# Altium PCB Optical Compresor_V1.PcbDoc (part 2 of 2)
Units mm, origin at the board's own origin, x right, y up, seen from the top; angles counter-clockwise.
Board outline 100 x 95 mm, 2 copper layers (Top Layer, Bottom Layer); 118 components, 73 nets, 334 pads, 87 vias.
Unrouted connection lines stored in the file: 63.
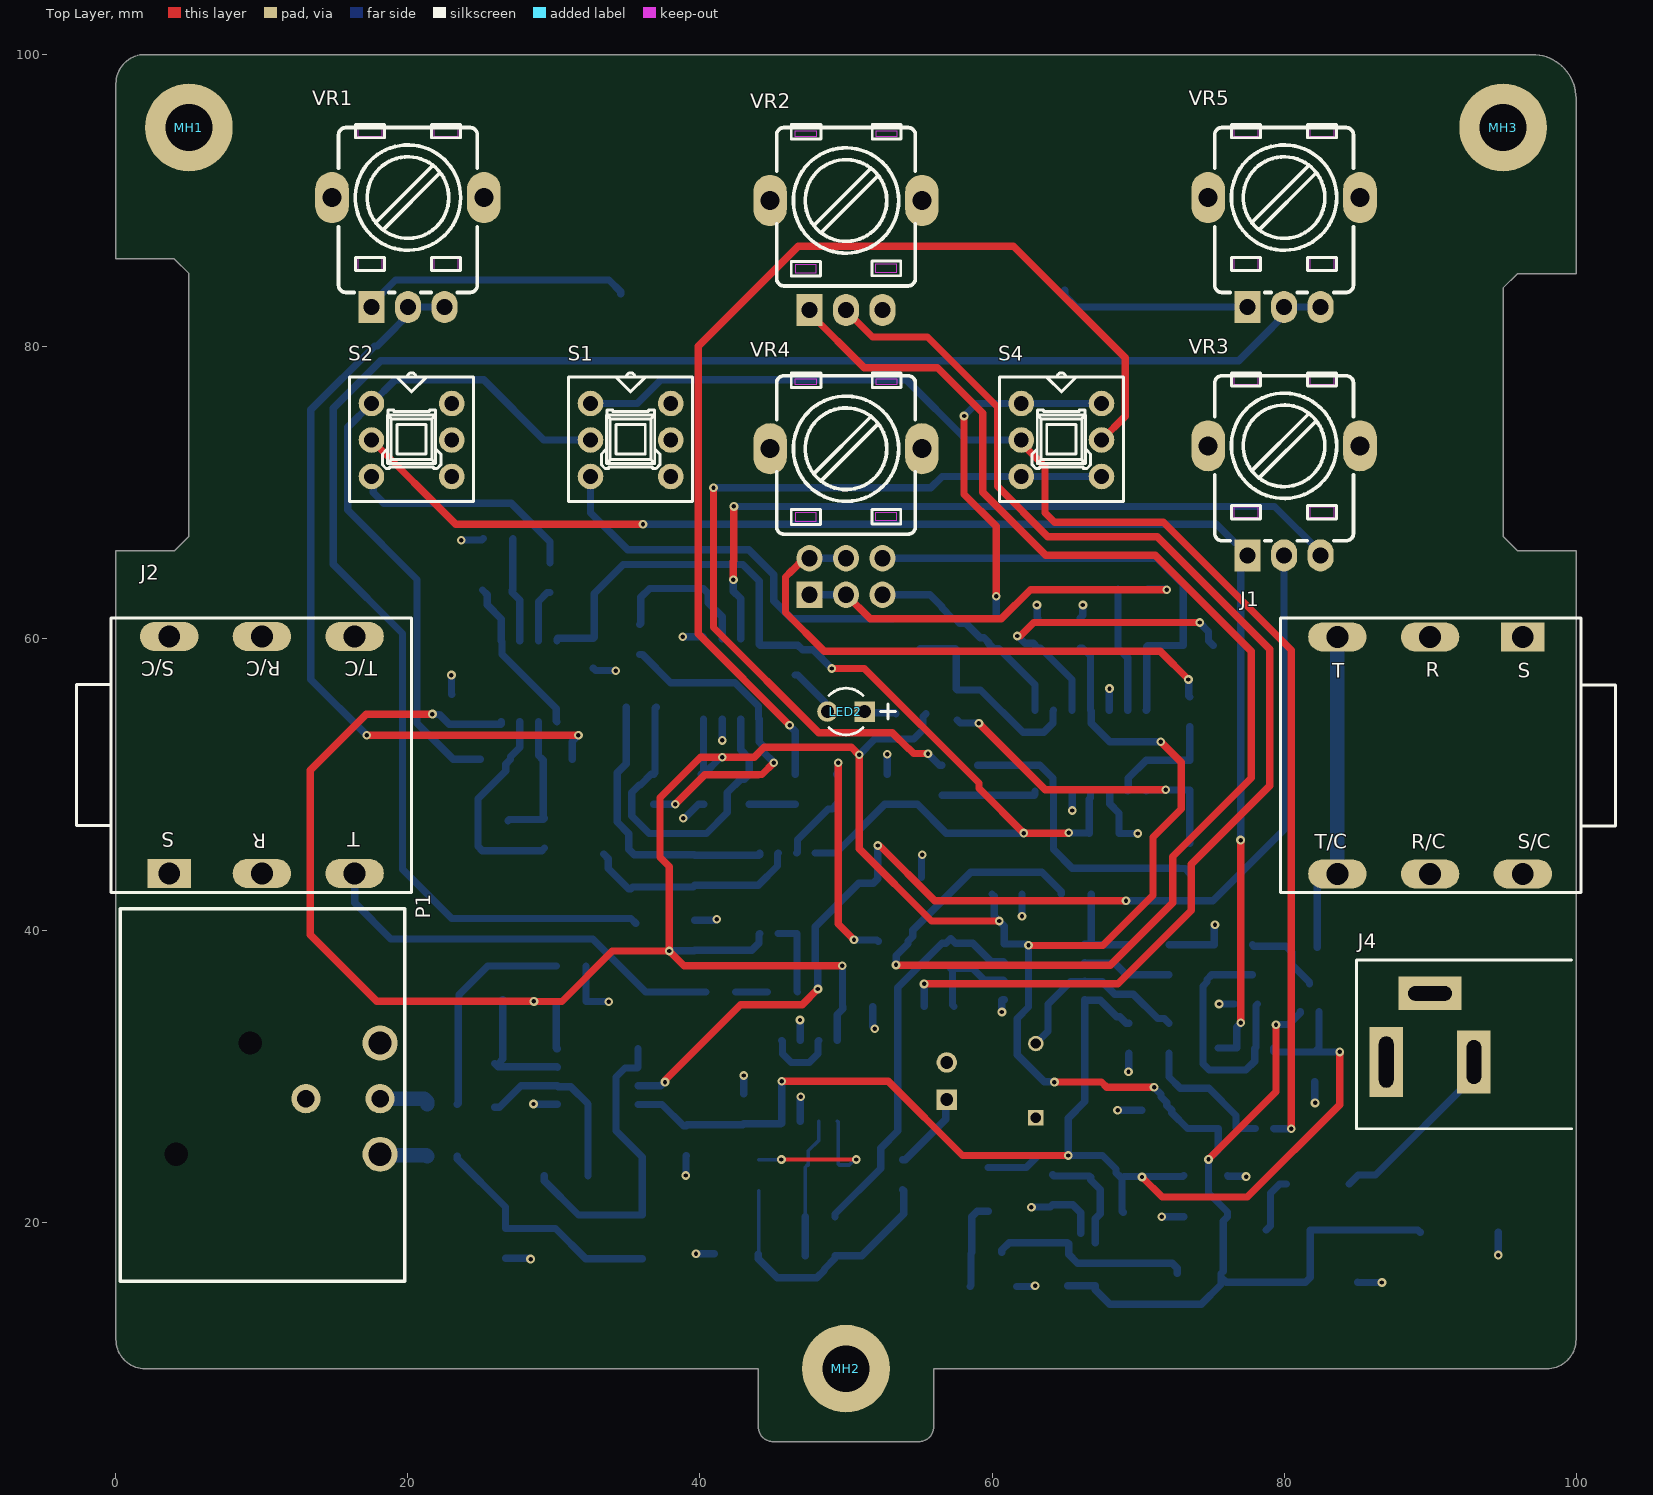
[diagram p0: Top Layer view]

## Part data (continued)
U2 U5: library part CMP-032-0003-7, "IC OPAMP GP 5MHZ 8SOIC", Case/Package=SOIC, Input Bias Current=500nA, Input Offset Voltage (Vos)=3mV, Manufacturer="ON Semiconductor", Manufacturer Part Number=MC33178DR2G, Max Dual Supply Voltage=18V, Max Frequency=100kHz, Max Operating Temperature=85°C, Min Dual Supply Voltage=2V, Min Operating Temperature=-40°C, Nominal Supply Current=900uA, Operating Supply Current=1.7mA, Output Current=80mA, Output Current per Channel=100mA, Package Quantity=1, Power Supply Rejection Ratio (PSRR)=80dB, Voltage Gain=106.02dB, Bandwidth=5MHz, Common Mode Rejection Ratio=80dB, ComponentLink1Description=https://datasheet.ciiva.com/30481/0900766b811a6563-30481352.pdf?src-supplier=RSComponents, ComponentLink1URL=https://datasheet.ciiva.com/30481/0900766b811a6563-30481352.pdf?src-supplier=RSComponents, ComponentLink2Description=https://datasheet.ciiva.com/1796/mc33178-d-1796435.pdf?src-supplier=Digi-Key, ComponentLink2URL=https://datasheet.ciiva.com/1796/mc33178-d-1796435.pdf?src-supplier=Digi-Key, ComponentLink3Description=https://datasheet.ciiva.com/1796/mc33178-d-1796436.pdf?src-supplier=Digi-Key, ComponentLink3URL=https://datasheet.ciiva.com/1796/mc33178-d-1796436.pdf?src-supplier=Digi-Key, ComponentLink4Description=https://datasheet.ciiva.com/8078/89824-8078566.pdf?src-supplier=Element14, ComponentLink4URL=https://datasheet.ciiva.com/8078/89824-8078566.pdf?src-supplier=Element14, ComponentLink5Description=https://datasheet.ciiva.com/48491/mc33178-d-48491755.pdf?src-supplier=Avnet, ComponentLink5URL=https://datasheet.ciiva.com/48491/mc33178-d-48491755.pdf?src-supplier=Avnet, ComponentLink6Description=https://datasheet.ciiva.com/2973/mc33178-d-2973665.pdf?src-supplier=Avnet, ComponentLink6URL=https://datasheet.ciiva.com/2973/mc33178-d-2973665.pdf?src-supplier=Avnet, ComponentLink7Description=https://datasheet.ciiva.com/1796/mc33178-d-1796437.pdf?src-supplier=Digi-Key, ComponentLink7URL=https://datasheet.ciiva.com/1796/mc33178-d-1796437.pdf?src-supplier=Digi-Key, ComponentLink8Description=https://datasheet.ciiva.com/17068/70275428-17068423.pdf?src-supplier=Allied+Electronics, ComponentLink8URL=https://datasheet.ciiva.com/17068/70275428-17068423.pdf?src-supplier=Allied+Electronics, ComponentLink9Description=https://datasheet.ciiva.com/26056/mc33178-d-26056808.pdf?src-supplier=Avnet+Europe, ComponentLink9URL=https://datasheet.ciiva.com/26056/mc33178-d-26056808.pdf?src-supplier=Avnet+Europe, Contact Plating=Tin, Design Item ID=MC33178D, Gain Bandwidth Product=5MHz, Halogen Free="Halogen Free", Height=0.059inch, Lead Free="Lead Free", Length=0.196inch, Max Supply Voltage=18V, Mouser part=863-MC33178DG, Nominal Gain Bandwidth Product=5MHz, Number of Amplifiers=2, Number of Channels=2, Number of Circuits=2, Number of Elements=2, Number of Pins=8, Packaging="Tape and Reel", PartId=1, Pricing 1="1 = 0.86000, 10 = 0.75300, 100 = 0.57700, 500 = 0.45614, 1000 = 0.36492 (USD)", Radiation Hardening=No, REACH SVHC="No SVHC", RoHS=Yes, Slew Rate=2V/µs, Source=main.SchLib, Stock 1=25846, Unity Gain Bandwidth Product=5MHz, Width=0.157inch
U7: library part CMP-0069-01166-3, "1.4MHz Cuk Converter, 5-pin SOT-23, Pb-Free", Manufacturer="Texas Instruments", PackageTopMarking=S40B*XTT, PowerWise=N, ComponentLink1Description="Datasheet URL", ComponentLink1URL=http://www.ti.com/general/docs/lit/getliterature.tsp?genericPartNumber=LM2611&fileType=pdf, CompType=Switcher, PackageDescription="Molded SOT-23, .115 x .063 x .040 in Body, 5 Lead, .0375 in Pitch", PackageReference=DBV0005A, PinCount=5, RoHS=Y
U8: library part CMP-028-0019-6, "Operational Amplifiers - Op Amps 2-18V Quad Low Power Industrial Temp SOIC14", Case/Package=SOIC, Input Bias Current=500nA, Input Offset Voltage (Vos)=3mV, Manufacturer="ON Semiconductor", Manufacturer Part Number=MC33179DR2G, Max Dual Supply Voltage=18V, Max Operating Temperature=85°C, Min Dual Supply Voltage=2V, Min Operating Temperature=-40°C, Nominal Supply Current=1.7mA, Output Current=80mA, Output Current per Channel=100mA, Package Quantity=2500, Power Supply Rejection Ratio (PSRR)=80dB, Voltage Gain=106.02dB, Bandwidth=5MHz, Common Mode Rejection Ratio=80dB, ComponentLink1Description=https://datasheet.ciiva.com/30481/0900766b81276f1b-30481445.pdf?src-supplier=RSComponents, ComponentLink1URL=https://datasheet.ciiva.com/30481/0900766b81276f1b-30481445.pdf?src-supplier=RSComponents, ComponentLink2Description=https://datasheet.ciiva.com/5787/89824-5787686.pdf?src-supplier=Farnell, ComponentLink2URL=https://datasheet.ciiva.com/5787/89824-5787686.pdf?src-supplier=Farnell, ComponentLink3Description=https://datasheet.ciiva.com/26056/mc33178-d-26056822.pdf?src-supplier=Avnet+Europe, ComponentLink3URL=https://datasheet.ciiva.com/26056/mc33178-d-26056822.pdf?src-supplier=Avnet+Europe, ComponentLink4Description=https://datasheet.ciiva.com/1796/mc33178-d-1796957.pdf?src-supplier=Digi-Key, ComponentLink4URL=https://datasheet.ciiva.com/1796/mc33178-d-1796957.pdf?src-supplier=Digi-Key, ComponentLink5Description=https://datasheet.ciiva.com/1796/mc33178-d-1796959.pdf?src-supplier=Digi-Key, ComponentLink5URL=https://datasheet.ciiva.com/1796/mc33178-d-1796959.pdf?src-supplier=Digi-Key, ComponentLink6Description=https://datasheet.ciiva.com/2973/mc33178-d-2973668.pdf?src-supplier=Avnet, ComponentLink6URL=https://datasheet.ciiva.com/2973/mc33178-d-2973668.pdf?src-supplier=Avnet, ComponentLink7Description=https://datasheet.ciiva.com/16212/mc33178-d-16212327.pdf?src-supplier=Future+Electronics, ComponentLink7URL=https://datasheet.ciiva.com/16212/mc33178-d-16212327.pdf?src-supplier=Future+Electronics, ComponentLink8Description=https://datasheet.ciiva.com/8078/89824-8078570.pdf?src-supplier=Element14, ComponentLink8URL=https://datasheet.ciiva.com/8078/89824-8078570.pdf?src-supplier=Element14, ComponentLink9Description=https://datasheet.ciiva.com/1796/mc33178-d-1796958.pdf?src-supplier=Digi-Key, ComponentLink9URL=https://datasheet.ciiva.com/1796/mc33178-d-1796958.pdf?src-supplier=Digi-Key, ComponentLink10Description=http://datasheet.octopart.com/MC33179DR2G-ON-Semiconductor-datasheet-164248.pdf?src-supplier=Newark, ComponentLink10URL=http://datasheet.octopart.com/MC33179DR2G-ON-Semiconductor-datasheet-164248.pdf?src-supplier=Newark, ComponentLink11Description=http://datasheet.octopart.com/MC33179DR2G-ON-Semiconductor-datasheet-14137761.pdf?src-supplier=IIIC, ComponentLink11URL=http://datasheet.octopart.com/MC33179DR2G-ON-Semiconductor-datasheet-14137761.pdf?src-supplier=IIIC, ComponentLink12Description=http://datasheet.octopart.com/MC33179DR2G-ON-Semiconductor-datasheet-82522822.pdf?src-supplier=Newark, ComponentLink12URL=http://datasheet.octopart.com/MC33179DR2G-ON-Semiconductor-datasheet-82522822.pdf?src-supplier=Newark, Contact Plating=Tin, Design Item ID=MC33179D, Gain Bandwidth Product=5MHz, Halogen Free="Halogen Free", Height=1.5mm, Lead Free="Lead Free", Length=8.75mm, Max Supply Voltage=18V, Mouser part=863-MC33179DR2G, Nominal Gain Bandwidth Product=5MHz, Number of Amplifiers=4, Number of Channels=4, Number of Circuits=4, Number of Elements=4, Number of Pins=14, Operating Supply Current=1.7mA, Packaging="Tape and Reel", Pricing 1="1 = 0.97000, 10 = 0.86300, 100 = 0.67300, 500 = 0.55598, 1000 = 0.43893 (USD)", Radiation Hardening=No, REACH SVHC="No SVHC", Slew Rate=2V/µs, Source=main.SchLib, Stock 1=2859, Unity Gain Bandwidth Product=5MHz, Width=4mm
VR1 VR3 VR5: library part CMP-028-0053-5, "LJV 9mm pot", Manufacturer Part Number 1="RP09110NOBA-H02-1485 (C104,KA15A6.5)", Darkglass part=D00-0002, Design Item ID="Pot100kC 9mm", Selective Soldering=YES, SET POSITION=1, Source=main.SchLib, Supplied by Darkglass=YES
VR2: library part CMP-028-0051-3, "LJV 9mm pot", Manufacturer Part Number="RP09110NOBA-H02-1484 (A104,KA15A6.5)", Darkglass part=D00-0000, Design Item ID="Pot100kA 9mm", PartId=1, Selective Soldering=YES, SET POSITION=1, Source=main.SchLib, Supplied by Darkglass=YES
VR4: library part CMP-028-0097-4, "Dual gang rev log pot", Design Item ID="Pot100kC DUAL LJV", Selective Soldering=YES, SET POSITION=1, Source=main.SchLib, Supplied by Darkglass=YES

## Via types
v1: diameter 0.6, hole 0.3, Top Layer to Bottom Layer, 87 vias

## Nets (pads, with @x,y where several pads share a name; then routed paths per layer and width w, separated by ;. In a path a pad name is that pad's centre, name@x,y a point inside that pad or via, vN(x,y) a via of type N, cw(c..) or ccw(c..) an arc to the next point about the centre after c; other vN are vias at no path point)
+9V: C7.2 C8.2 C13.2 C14.2 C18.2 C20.1 C22.2 C24.2 C30.2 C35.2 D1.2 D5.2 L1.1 R21.2 R22.2 U1.8 U2.8 U3.8 U4.8 U5.8 U6.8 U7.4 U7.5 U8.4 U9.4 | length 255.7
  Top Layer w0.5: v1(21.675,54.825) 17.14,54.825 13.3,50.985 13.3,39.725 17.857,35.168 28.607,35.168 v1(28.625,35.15) 30.55,35.15 34,38.6 v1(37.9,38.6) ; v1(49.75,37.6) 38.9,37.6 v1(37.9,38.6) ; v1(60.494,40.654) 55.861,40.654 50.9,45.615 v1(50.9,52.05) 50.873,52.05 50.373,52.55 44.387,52.55 43.712,51.875 v1(41.525,51.875) 40.04,51.875 37.257,49.092 37.257,45.031 37.9,44.389 v1(37.9,38.6) ; v1(62.5,39) 62.525,38.975 67.585,38.975 71.025,42.415 71.025,46.4 72.95,48.325 72.95,51.525 v1(71.55,52.925) ; v1(64.275,29.625) 67.503,29.625 67.853,29.275 v1(71.1,29.275) ; v1(74.825,24.33) 79.45,28.955 v1(79.45,33.55)
  Bottom Layer w0.5: v1(21.675,54.825) 21.694,54.806 22.144,54.806 22.825,54.125 C8.2 26.345,54.125 26.395,54.175 U2.8 U2.8@26.398,54.312 ; v1(28.625,35.15) C35.2 30.15,31.955 30.2,31.905 U6.8 ; v1(37.9,38.6) 37.919,38.619 39.619,38.619 C18.2 43.55,38.65 44.035,39.135 44.035,39.75 U5.8 ; C30.2 40.25,50.7 41.406,51.856 41.506,51.856 v1(41.525,51.875) ; C30.2@40.245,50.87 U9.4 ; U4.8 49.405,34.257 49.773,34.625 C14.2 49.762,34.812 49.762,37.588 v1(49.75,37.6) ; v1(50.9,52.05) 51.975,53.125 54.65,53.125 55.274,53.749 55.274,54.649 R22.2 ; C13.2 60.148,42.352 60.148,41 v1(60.494,40.654) 60.84,40.308 U3.8 62.393,39.08 62.473,39 v1(62.5,39) 62.5,34.765 61.72,33.985 61.72,31.505 63.581,29.644 64.256,29.644 v1(64.275,29.625) ; U7.5 U7.4 67.075,15.4 68.057,14.418 74.337,14.418 75.687,15.768 L1.1@75.687,16.275 ; C24.2 66.2,59.35 66.75,58.8 U8.4 66.79,55.045 66.79,54.204 68.069,52.925 v1(71.55,52.925) ; v1(71.1,29.275) 71.1,29.257 71.575,28.782 71.575,28.627 71.975,28.227 71.975,28.025 C7.2 72.3,27.525 73.385,26.44 U1.8 75.495,25 v1(74.825,24.33) 74.825,22.025 76.125,20.725 C22.2 75.834,20.109 75.834,16.666 L1.1 L1.1@75.687,16.275 ; v1(79.45,33.55) 79.469,33.569 80.319,33.569 81.1,34.35 D1.2 ; C20.1 89.165,19.5 R21.2 81.789,16.245 D5.2 76.037,15.925 L1.1@75.687,16.275
-9V: C9.1 C10.1 C15.1 C16.1 C19.1 C23.2 C25.1 C26.2 C33.1 C36.1 D1.1 L2.2 R23.2 U1.4 U2.4 U3.4 U4.4 U5.4 U6.4 U8.11 U9.8 | length 164.9
  Top Layer w0.5: v1(45.6,29.675) 52.898,29.675 57.973,24.6 v1(65.225,24.6) ; v1(49.025,57.95) 51.26,57.95 59.103,50.106 59.103,49.747 v1(62.175,46.675) 65.208,46.675 65.233,46.7 v1(65.26,46.7) ; v1(70.275,23.125) 71.65,21.75 77.485,21.75 83.815,28.08 v1(83.815,31.69)
  Bottom Layer w0.5: U2.4 30.205,59.965 30.255,60.015 C10.1 32.758,60.073 32.758,63.083 34.748,65.073 42.931,65.073 44.055,63.948 U9.8 44.055,59.6 44.105,59.55 46.7,59.55 47.025,59.225 47.75,59.225 v1(49.025,57.95) ; U6.4 37.405,28.095 38.875,26.625 C36.1 39.12,26.695 42.93,26.695 C16.1 45.545,26.766 45.595,26.816 U4.4 45.598,26.953 45.598,29.673 v1(45.6,29.675) ; U5.4 49.32,45.32 52.65,48.65 C19.1 54.899,48.65 56.874,46.675 v1(62.175,46.675) ; L2.2 62.349,23.775 63.174,24.6 v1(65.225,24.6) ; v1(65.26,46.7) 65.279,46.681 66.619,46.681 C25.1 66.65,48.995 66.75,49.095 U8.11 ; R23.2 68.488,23.425 68.488,23.676 67.564,24.6 v1(65.225,24.6) ; R23.2@68.9,23.012 68.9,20.787 C23.2 ; R23.2@69.05,23.163 73.063,23.163 C26.2 ; C15.1 69.2,33.65 68.75,34.1 68.534,34.1 67.414,35.22 66.41,35.22 U3.4 66.36,28.291 65.225,27.156 v1(65.225,24.6) ; U1.4 79.305,31.74 79.355,31.69 C9.1 ; D1.1 82.4,31.992 C9.1 ; v1(83.815,31.69) C9.1
GND: C4.2 C5.2 C7.1 C8.1 C9.2 C10.2 C12.1 C13.1 C14.1 C15.2 C16.2 C18.1 C19.2 C20.2 C22.1 C24.1 C25.2 C26.1 C29.2 C30.1 C33.2 C35.1 C36.2 D5.1 D6.2 J1.1 J1.6 J2.1 J2.2 J2.4 J2.5 J2.6 J4.1 J4.3 LDR1.1 LED1.2 LED2.2 P1.1 P1.4 R2.2 R4.1 R9.2 R34.2 R40.1 R43.2 R44.1 R45.2 U3.5 U4.3 U4.6 U6.5 U7.2 U8.5 U8.10 U8.12 U9.3 U9.5 VR1.4 VR1.5 VR2.3 VR2.4 VR2.5 VR3.4 VR3.5 VR4.7 VR4.8 VR5.4 VR5.5 | length 67.3
  Bottom Layer w0.5: v1(22.975,57.5) 22.988,57.487 22.988,56.187 C8.1 ; v1(23.65,66.725) 23.669,66.744 25.044,66.744 R4.1 ; R44.1 28.323,17.55 28.373,17.5 v1(28.4,17.5) ; v1(28.6,28.125) 28.615,28.11 30.225,28.11 U6.5 ; R45.2 C35.1 32.212,35.137 33.738,35.137 v1(33.75,35.125) ; C10.2 32.846,57.819 34.206,57.819 v1(34.225,57.8) ; v1(38.825,60.125) 40.195,60.125 40.245,60.075 U9.5 ; v1(38.85,47.7) 38.869,47.719 38.969,47.719 39.9,48.65 C30.1 C30.1@40.25,48.65 ; v1(39.025,23.225) 39.038,23.238 39.038,24.562 C36.2 ; C18.1 41.048,40.7 41.123,40.775 v1(41.15,40.775) ; v1(39.725,17.875) 39.737,17.863 40.987,17.863 C12.1 ; U9.3 41.52,54.46 41.52,53.03 v1(41.525,53.025) ; C16.2 v1(43,30.075) ; C33.2 46.7,57.5 48.558,55.642 48.558,55.172 LED2.2 ; v1(46.85,33.875) 46.858,33.867 46.858,32.478 U4.6 ; U4.3 46.865,28.563 46.9,28.598 v1(46.9,28.625) ; C14.1 51.823,33.454 51.975,33.302 v1(51.975,33.275) ; C19.2 v1(52.825,52.073) ; R40.1 55.175,45.123 55.225,45.173 v1(55.225,45.2) ; v1(60.675,34.425) 60.675,35.22 60.725,35.27 U3.5 ; D6.2 62.876,15.628 62.923,15.675 v1(62.95,15.675) ; v1(62.05,40.975) C13.1 ; v1(62.7,21.05) 62.719,21.069 63.994,21.069 R43.2 65.525,21.225 66.075,20.675 66.075,19.277 ; v1(63.075,62.3) 63.094,62.281 63.094,61.456 R34.2 ; U8.12 65.49,49.555 65.49,48.235 v1(65.5,48.225) ; C24.1 66.206,61.581 66.206,62.281 v1(66.225,62.3) ; U8.10 68.06,49.525 68.06,48.684 68.7,48.044 C25.2 v1(69.975,46.65) ; U8.5 68.035,55.1 68.035,56.56 v1(68.05,56.575) ; v1(68.6,27.7) C7.1 ; v1(69.35,30.325) 69.363,30.337 69.363,31.588 C15.2 ; v1(71.625,20.4) C22.1 ; R9.2 R2.2 75.225,40.323 75.275,40.373 v1(75.275,40.4) ; v1(75.55,34.975) C4.2 ; C26.1 76.181,23.169 77.381,23.169 v1(77.4,23.15) ; C9.2 82.112,29.627 82.112,28.213 v1(82.125,28.2) ; D5.1 85.05,15.9 v1(86.7,15.9) ; v1(94.675,17.775) C20.2
NetC1_1: C1.1 D1.3 R1.2 | length 5.6
  Bottom Layer w0.5: C1.1 77.925,38.938 80.136,38.938 R1.2 80.548,38.525 80.548,37.652 81.75,36.45 D1.3
NetC1_2: C1.2 C4.1 R2.1 U1.3 | length 17.2
  Bottom Layer w0.5: C1.2 R2.1 75.05,36.975 74.725,36.65 74.725,36.475 74.445,36.195 74.445,30.889 74.884,30.45 77.376,30.45 77.985,31.059 77.985,31.91 U1.3@78.085,32.01 ; U1.3 U1.3@78.085,32.01 ; C4.1 78.085,34.873 U1.3@78.085,32.01
NetC2_1: C2.1 S2.3 | length 16.1
  Bottom Layer w0.5: S2.3 17.625,70.975 17.625,70 18.35,69.275 27.076,69.275 29.725,66.626 C2.1
NetC2_2: C2.2 U2.3 | length 3.7
  Bottom Layer w0.5: U2.3 28.935,62.535 29.55,63.15 C2.2
NetC3_1: C3.1 C6.2 R3.2 U2.7 | length 14.3
  Bottom Layer w0.5: C3.1 26.7,51.4 26.7,50.925 24.8,49.025 R3.2 24.8,45.768 25.093,45.475 29.175,45.475 C6.2 ; C3.1@27.025,51.9 27.665,52.54 U2.7
NetC3_2: C3.2 S1.1 S2.2 | length 47.3
  Bottom Layer w0.5: C3.2 23.099,51.725 20.625,54.199 20.625,64.05 15.875,68.8 15.875,74.475 S2.2 19.125,77.725 25.182,77.725 29.307,73.6 S1.1
NetC5_1: C5.1 VR1.1 | length 18.4
  Bottom Layer w0.5: VR1.1 17.5,82.901 19.15,84.551 33.775,84.551 34.575,83.751 C5.1
NetC6_1: C6.1 R3.1 R6.2 U2.6 | length 9.4
  Bottom Layer w0.5: R3.1 26.938,47.613 29.262,47.613 C6.1 29.262,47.787 29.262,51.663 R6.2 28.935,51.99 U2.6
NetC11_1: C11.1 R10.1 U3.1 | length 6.3
  Bottom Layer w0.5: U3.1 66.75,39.08 66.8,39.13 C11.1 ; U3.1@66.875,39.025 R10.1
NetC11_2: C11.2 R35.1 VR2.1 | length 98.8
  Top Layer w0.5: VR2.1 47.5,82.3 51.255,78.546 56.271,78.546 59.375,75.442 59.375,70.013 63.688,65.7 71.186,65.7 77.75,59.136 77.75,50.45 72.375,45.075 72.375,41.9 68.1,37.625 53.9,37.625 53.894,37.631 53.444,37.631 v1(53.425,37.65)
  Bottom Layer w0.5: v1(53.425,37.65) 53.444,37.669 53.444,38.294 54.25,39.1 R35.1 54.575,39.6 54.575,40.025 58.55,44 63.425,44 64.75,42.675 C11.2
NetC12_2: C12.2 D3.2 R11.1 R15.2 | length 18.8
  Bottom Layer w0.25: C12.2 44.025,17.875 D3.2
  Bottom Layer w0.5: C12.2 44,17.525 45.3,16.225 48.001,16.225 48.525,16.749 48.525,16.825 49.25,17.55 R11.1 51.075,17.725 53.95,20.6 53.95,22.175 R15.2
NetC17_1: C17.1 U5.6 U5.7 | length 5.3
  Bottom Layer w0.5: U5.7 U5.6 46.65,39.775 46.65,35.825 C17.1
NetC17_2: C17.2 R8.2 | length 2.2
  Bottom Layer w0.5: R8.2 C17.2
NetC21_1: C21.1 L1.2 U7.1 | length 13.9
  Bottom Layer w0.5: C21.1 60.67,18.125 61.17,18.625 U7.1 65.25,18.55 65.25,17.826 65.851,17.225 72.337,17.225 72.687,16.875 L1.2
NetC21_2: C21.2 D6.1 L2.1 | length 6.1
  Bottom Layer w0.5: D6.1 58.56,15.688 58.56,17.89 C21.2 58.62,20.412 58.983,20.775 L2.1
NetC23_1: C23.1 R23.1 R43.1 U7.3 | length 7.6
  Bottom Layer w0.5: R43.1 64.237,23.187 66.675,23.187 R23.1 66.763,22.925 67.413,22.275 C23.1 67.413,20.6 67.075,20.262 U7.3
NetC27_1: C27.1 R29.2 U8.6 | length 8.6
  Bottom Layer w0.5: R29.2 C27.1 68.625,59.35 69.29,58.685 U8.6
NetC27_2: C27.2 R20.2 U8.7 VR4.6 | length 32.4
  Bottom Layer w0.5: VR4.6 71.31,65.5 73.1,63.71 R20.2 C27.2 70.6,59.45 70.6,55.125 U8.7
NetC28_1: C28.1 R30.2 U8.9 | length 7.9
  Bottom Layer w0.5: U8.9 69.33,49.605 69.33,50.446 70.559,51.675 C28.1 R30.2
NetC28_2: C28.2 R14.2 R18.1 U8.8 | length 23
  Top Layer w0.5: v1(59.1,54.2) 63.65,49.65 v1(71.9,49.65)
  Bottom Layer w0.5: R14.2 57.823,54.219 59.081,54.219 v1(59.1,54.2) ; U8.8 70.56,49.61 70.6,49.65 v1(71.9,49.65) ; v1@71.9,49.625 C28.2 R18.1
NetC29_1: C29.1 VR5.1 | length 13.2
  Bottom Layer w0.5: C29.1 64.975,83.501 65.775,82.701 VR5.1
NetC31_1: C31.1 R35.2 | length 15.1
  Top Layer w0.5: v1(49.475,51.5) 49.475,40.45 v1(50.55,39.375)
  Bottom Layer w0.5: C31.1 49.456,50.781 49.456,51.481 v1(49.475,51.5) ; v1(50.55,39.375) 50.569,39.356 52.119,39.356 R35.2
NetC31_2: C31.2 U5.3 | length 4.6
  Bottom Layer w0.5: U5.3 46.675,45.37 46.675,46.221 48.779,48.325 49.05,48.325 C31.2
NetC32_1: C32.1 S4.4 | length 73.6
  Top Layer w0.5: v1(46.135,54.06) 39.875,60.319 39.875,80.011 46.739,86.875 61.475,86.875 69.125,79.225 69.125,75.225 S4.4
  Bottom Layer w0.5: v1(46.135,54.06) 46.135,54.033 46.525,53.642 C32.1
NetC32_2: C32.2 R32.1 | length 3.2
  Bottom Layer w0.5: R32.1 C32.2
NetC34_1: C34.1 R33.2 R36.1 U5.2 | length 14.8
  Bottom Layer w0.5: R36.1 33.725,44.925 33.725,44.25 35.1,42.875 35.225,42.875 R33.2 35.388,42.988 39.538,42.988 C34.1 43.986,43.1 45.305,44.419 45.305,45.27 U5.2
NetC34_2: C34.2 R28.1 R36.2 U5.1 | length 19.6
  Bottom Layer w0.5: R28.1 34.95,51.432 34.325,50.807 34.325,47.434 35.125,46.634 35.125,45.575 35.5,45.2 39.6,45.2 C34.2 44.035,45.15 44.085,45.2 U5.1
NetC37_1: C37.1 R38.1 R44.2 | length 16.6
  Bottom Layer w0.5: C37.1 23.375,24.375 26.675,21.075 R44.2 30.1,19.6 32.175,17.525 R38.1
NetC38_1: C38.1 R39.1 R45.1 | length 15
  Bottom Layer w0.5: C38.1@23.375,28.1 23.438,28.163 23.438,35.212 R39.1 23.5,35.6 25.475,37.575 R45.1
NetD2_1: D2.1 R11.2 R37.1 U4.2 | length 9.7
  Bottom Layer w0.25: R37.1 47.2,23.8 47.35,23.95 D2.1 47.42,24.913 48.135,25.628 U4.2
  Bottom Layer w0.5: R11.2 R37.1
NetD2_2: D2.2 D3.1 U4.1 | length 11.1
  Top Layer w0.25: v1(45.575,24.325) v1(50.7,24.325)
  Bottom Layer w0.25: D3.1 44.036,24.314 45.564,24.314 v1(45.575,24.325) ; U4.1 49.468,26.888 49.468,24.013 D2.2 50.23,23.95 50.605,24.325 v1(50.7,24.325)
NetD4_A: D4.A J4.2 | length 12.6
  Bottom Layer w0.5: D4.A 85.087,23.264 86.264,23.264 93,30 J4.2
NetD4_K: D4.K R21.1 | length 4
  Bottom Layer w0.5: R21.1 79.075,19.786 79.075,22.002 79.712,22.639 D4.K
NetJ1_3: J1.3 J1.4 R1.1 | length 22.2
  Bottom Layer w0.5: R1.1 82.273,43.102 83.056,43.885 J1.4
  Bottom Layer w1: J1.4 J1.3
NetJ2_3: J2.3 R8.1 | length 28.6
  Bottom Layer w0.5: J2.3 16.35,41.9 18.825,39.425 32.651,39.425 36.276,35.8 R8.1
NetLDR1_2: LDR1.2 R7.1 U3.3 | length 13.2
  Bottom Layer w0.5: LDR1.2 63.834,33.099 63.834,34.951 65.374,36.49 66.31,36.49 U3.3 66.41,36.49 67.559,36.49 68.399,35.65 69.676,35.65 71.351,33.975 71.8,33.975 R7.1
NetLED1_1: LED1.1 R15.1 | length 5.5
  Bottom Layer w0.5: R15.1 54.05,24.3 56.827,27.077 56.827,28.357 LED1.1
NetLED2_1: LED2.1 R22.1 | length 2.2
  Bottom Layer w0.5: LED2.1 51.345,54.925 53.35,54.925 R22.1
NetR4_2: R4.2 R5.1 U2.2 | length 7.3
  Bottom Layer w0.5: R4.2 27.175,66.825 27.175,63.35 R5.1 27.15,63.15 27.665,62.635 U2.2
NetR5_2: R5.2 U2.1 U2.5 | length 11.1
  Bottom Layer w0.5: R5.2 25.425,63 25.425,62.31 26.395,61.34 U2.1 26.445,59.78 26.445,58.921 30.155,55.211 30.155,54.36 U2.5
NetR6_1: R6.1 VR1.2 VR1.3 | length 52.6
  Top Layer w0.5: v1(17.175,53.375) v1(31.675,53.375)
  Bottom Layer w0.5: v1(17.175,53.375) 13.35,57.2 13.35,75.663 17.719,80.032 17.892,80.032 19.15,81.29 19.15,81.299 20,82.149 VR1.2 VR1.3 ; R6.1 31.25,52.95 v1(31.675,53.375)
NetR7_2: R7.2 U1.6 U1.7 | length 9.5
  Bottom Layer w0.5: R7.2 72.125,29.975 72.9,29.2 74.856,29.2 76.715,27.341 76.715,26.49 U1.7 U1.6
NetR9_1: R9.1 R10.2 U3.2 | length 6.1
  Bottom Layer w0.5: U3.2 66.41,37.76 68.415,37.76 69.2,36.975 R9.1
NetR12_1: R12.1 R13.2 U3.6 | length 6.7
  Bottom Layer w0.5: R13.2 57.288,34.913 57.288,37.288 R12.1 58.675,37.4 59.485,36.59 60.79,36.59 U3.6
NetR12_2: R12.2 R37.2 U3.7 | length 26.8
  Bottom Layer w0.5: R37.2 49.25,20.587 52.375,23.712 52.375,25.101 53.55,26.276 53.55,36.1 56.575,39.125 56.85,39.125 R12.2 57.5,39.125 58.674,39.125 59.939,37.86 60.79,37.86 U3.7
NetR13_1: R13.1 VR2.2 | length 83.9
  Top Layer w0.5: VR2.2 50,82.467 51.817,80.65 55.581,80.65 60.375,75.856 60.375,70.427 63.827,66.975 71.325,66.975 79.025,59.275 79.025,49.922 73.65,44.547 73.65,41.371 68.629,36.35 v1(55.35,36.35)
  Bottom Layer w0.5: R13.1 v1(55.35,36.35)
NetR14_1: R14.1 R16.1 R17.2 U8.2 | length 14.2
  Bottom Layer w0.5: R17.2 R16.1 57.546,59.254 57.546,56.546 R14.1 59.216,56.475 62.116,53.575 63.541,53.575 64.17,54.204 64.17,55.045 U8.2
NetR16_2: R16.2 R26.2 U8.1 VR4.3 | length 15
  Bottom Layer w0.5: VR4.3 55.751,63 56.575,62.176 56.575,62.1 57.3,61.375 R16.2@57.65,61.375 ; R16.2 57.8,61.05 58.2,61.05 59.2,60.05 59.45,60.05 59.783,59.717 59.783,59.65 60.108,59.325 60.458,59.325 62.94,56.843 U8.1
NetR17_1: R17.1 S1.3 | length 29.1
  Bottom Layer w0.5: S1.3 32.5,68.625 35.05,66.075 43.342,66.075 45.055,64.362 45.055,62.585 46.29,61.35 53.184,61.35 53.208,61.375 R17.1
NetR18_2: R18.2 R19.1 U8.13 | length 20.5
  Bottom Layer w0.5: R19.1 63.291,51.325 64.17,50.446 64.17,49.605 U8.13 64.21,45.565 65.5,44.275 72.757,44.275 72.782,44.25 73.225,44.25 R18.2
NetR19_2: R19.2 R27.2 U8.14 | length 6.6
  Bottom Layer w0.5: R27.2 R19.2 62.9,49.275 62.94,49.315 U8.14
NetR20_1: R20.1 R34.1 U8.3 | length 21.9
  Top Layer w0.5: v1(61.733,60.179) 61.929,60.179 62.85,61.1 v1(74.225,61.1)
  Bottom Layer w0.5: v1(61.733,60.179) 61.76,60.179 62.265,59.675 62.825,59.675 R34.1 63.325,59.35 65.48,57.195 U8.3 ; v1(74.225,61.1) 74.225,61.073 74.825,60.473 74.825,59.85 R20.1
NetR24_1: R24.1 R31.1 U9.6 | length 10.4
  Bottom Layer w0.5: R31.1 35.95,61.04 35.95,62.825 36.55,63.425 R24.1 40.552,63.1 40.552,62.458 41.515,61.495 U9.6
NetR24_2: R24.2 U9.7 VR3.3 | length 51
  Top Layer w0.5: v1(42.288,64.023) 42.288,65.298 42.313,65.323 42.313,69.037 v1(42.325,69.05)
  Bottom Layer w0.5: v1(42.288,64.023) 42.282,64.017 42.282,63.431 R24.2 42.277,63.25 42.785,62.742 U9.7 ; v1(42.325,69.05) 79.351,69.05 82.5,65.901 VR3.3
NetR25_1: R25.1 R28.2 R32.2 U9.2 | length 23.3
  Bottom Layer w0.5: R28.2 36.912,55.218 36.912,50.787 R25.1 36.65,50.7 35.925,49.975 35.849,49.975 35.325,49.451 35.325,47.849 36.524,46.65 40.441,46.65 41.875,48.084 41.875,49.451 42.799,50.375 43.05,50.375 R32.2 43.375,51.79 42.785,52.38 U9.2
NetR25_2: R25.2 R31.2 U9.1 | length 23.3
  Top Layer w0.5: v1(38.307,48.657) 40.322,50.672 43.997,50.672 44.018,50.693 44.243,50.693 v1(45.05,51.5)
  Bottom Layer w0.5: R31.2 36.05,58.915 37.987,56.978 42.393,56.978 44.005,55.366 44.005,54.515 U9.1 44.055,52.92 44.343,52.632 44.343,52.234 45.05,51.527 v1(45.05,51.5) ; R25.2 36.828,48.653 38.304,48.653 v1(38.307,48.657)
NetR26_1: R26.1 S4.2 S4.5 | length 24.5
  Top Layer w0.5: v1(58.087,75.245) 58.087,69.887 60.283,67.69 v1(60.283,62.892)
  Bottom Layer w0.5: v1(58.087,75.245) 58.943,76.1 S4.2 S4.5 ; R26.1 v1(60.283,62.892)
NetR27_1: R27.1 S4.3 S4.6 | length 56
  Top Layer w0.5: v1(40.925,70.325) 40.925,60.754 48.129,53.55 53.175,53.55 54.275,52.45 54.316,52.45 54.638,52.128 55.597,52.128 v1(55.616,52.109)
  Bottom Layer w0.5: v1(40.925,70.325) 55.812,70.325 56.587,71.1 S4.3 S4.6 ; v1(55.616,52.109) 56.4,51.325 R27.1
NetR29_1: R29.1 VR4.1 VR4.2 | length 27.3
  Top Layer w0.5: VR4.2 51.65,61.35 60.64,61.35 62.64,63.35 v1(71.975,63.35)
  Bottom Layer w0.5: VR4.1 VR4.2 ; R29.1 71.898,63.4 71.948,63.35 v1(71.975,63.35)
NetR30_1: R30.1 VR4.4 VR4.5 | length 37.8
  Top Layer w0.5: VR4.4 47.148,65.5 46.299,64.65 46.29,64.65 45.85,64.211 45.85,61.79 48.511,59.129 71.521,59.129 v1(73.45,57.2)
  Bottom Layer w0.5: VR4.4 VR4.5 ; v1(73.45,57.2) 73.469,57.181 73.469,56.081 R30.1
NetR33_1: R33.1 VR5.2 VR5.3 | length 121.9
  Bottom Layer w0.5: R33.1@35.6,40.5 R33.1 23,40.825 19.625,44.2 19.625,60.345 14.875,65.095 14.875,75.773 18.133,79.032 76.892,79.032 79.15,81.29 79.15,81.299 80,82.149 VR5.2 VR5.3
NetR38_2: R38.2 R41.1 U6.1 U6.2 | length 21.3
  Bottom Layer w0.5: R41.1 29.325,22.875 31.675,20.525 R38.2 36.05,24.5 34.25,26.3 34.25,29.976 34.859,30.585 35.71,30.585 U6.2 U6.1
NetR39_2: R39.2 R42.2 U6.7 | length 8.9
  Bottom Layer w0.5: R42.2 26.165,30.685 30.19,30.685 U6.7 ; R42.2@26.2,30.9 26.5,31.2 R39.2
NetR40_2: R40.2 U5.5 U6.3 VR3.2 | length 77.6
  Top Layer w0.5: v1(37.6,29.625) 37.6,29.75 42.775,34.925 47,34.925 v1(48.075,36) ; v1(52.175,45.825) 52.3,45.825 56.075,42.05 v1(69.175,42.05)
  Bottom Layer w0.5: U6.3 37.313,29.365 37.573,29.625 v1(37.6,29.625) ; v1(48.075,36) 48.075,37.569 47.895,37.749 U5.5 47.895,40.26 50.875,43.24 51.875,43.24 52.175,43.54 v1(52.175,45.825) ; v1(69.175,42.05) 75.135,42.05 80,46.915 VR3.2
NetR41_2: R41.2 R42.1 U6.6 | length 12.4
  Bottom Layer w0.5: R42.1 26.275,27.9 27.74,29.365 U6.6 30.29,29.315 31.141,29.315 32.325,28.131 R41.2
NetS1_2: S1.2 S4.1 U1.5 | length 92.3
  Top Layer w0.5: S4.1 62,73.398 63.625,71.773 63.625,68.625 64.275,67.975 71.739,67.975 80.5,59.214 v1(80.5,26.425)
  Bottom Layer w0.5: S1.2 35.702,76.1 37.327,77.725 54.122,77.725 58.247,73.6 S4.1 ; U1.5 79.32,26.425 v1(80.5,26.425)
NetS2_1: S2.1 U1.1 U1.2 VR3.1 | length 98.7
  Top Layer w0.5: S2.1 23.275,67.825 v1(36.1,67.825) ; v1(77.025,46.2) 77.03,46.195 77.03,33.688 v1(77.035,33.683)
  Bottom Layer w0.5: v1(36.1,67.825) 75.376,67.825 76.65,66.551 76.85,66.551 77.5,65.901 VR3.1 77.025,65.225 v1@77.025,46.227 ; U1.1 U1.2 76.765,33.386 77.035,33.656 v1(77.035,33.683)
NetU4_5: U4.5 U4.7 | length 4.8
  Bottom Layer w0.5: U4.5 45.645,32.421 45.645,31.57 46.254,30.961 47.476,30.961 48.085,31.57 48.085,32.421 U4.7
XLR_OUT_N: C38.2 P1.3 | length 3.5
  Bottom Layer w1: P1.3 21.11,28.49 21.325,28.275 C38.2@21.325,28.1
XLR_OUT_P: C37.2 P1.2 | length 3.3
  Bottom Layer w1: P1.2 18.155,24.615 21.26,24.615 C37.2
pads on no net: J1.2 J1.5 MH1.1 MH2.1 MH3.1 P1. S1.4 S1.5 S1.6 S2.4 S2.5 S2.6

## Text inside footprints (layer, text, board x,y; h text height)
J1: Top Overlay "T" at 83.3,57.3 h1; Top Overlay "T/C" at 82.1,45.6 h1; Top Overlay "R/C" at 88.7,45.6 h1; Top Overlay "R" at 89.7,57.4 h1; Top Overlay "S" at 96,57.3 h1; Top Overlay "S/C" at 96,45.6 h1
J2: Top Overlay "T" at 16.7,46.73 h1 r180; Top Overlay "T/C" at 17.9,58.43 h1 r180; Top Overlay "R/C" at 11.3,58.43 h1 r180; Top Overlay "R" at 10.3,46.63 h1 r180; Top Overlay "S" at 4,46.73 h1 r180; Top Overlay "S/C" at 4,58.43 h1 r180
P1: Mechanical 17 "Chassis edge" at 0.29,22.642 h1 r90